# Altium PCB ALU_Ctrl.PcbDoc
Units mil, origin at the board's own origin, x right, y up, seen from the top; angles counter-clockwise.
Board outline 5200 x 2700 mil, 2 copper layers (Top Layer, Bottom Layer), stack 61.756 mil thick; 35 components, 62 nets, 261 pads, 202 vias.
Unrouted connection lines stored in the file: 28.
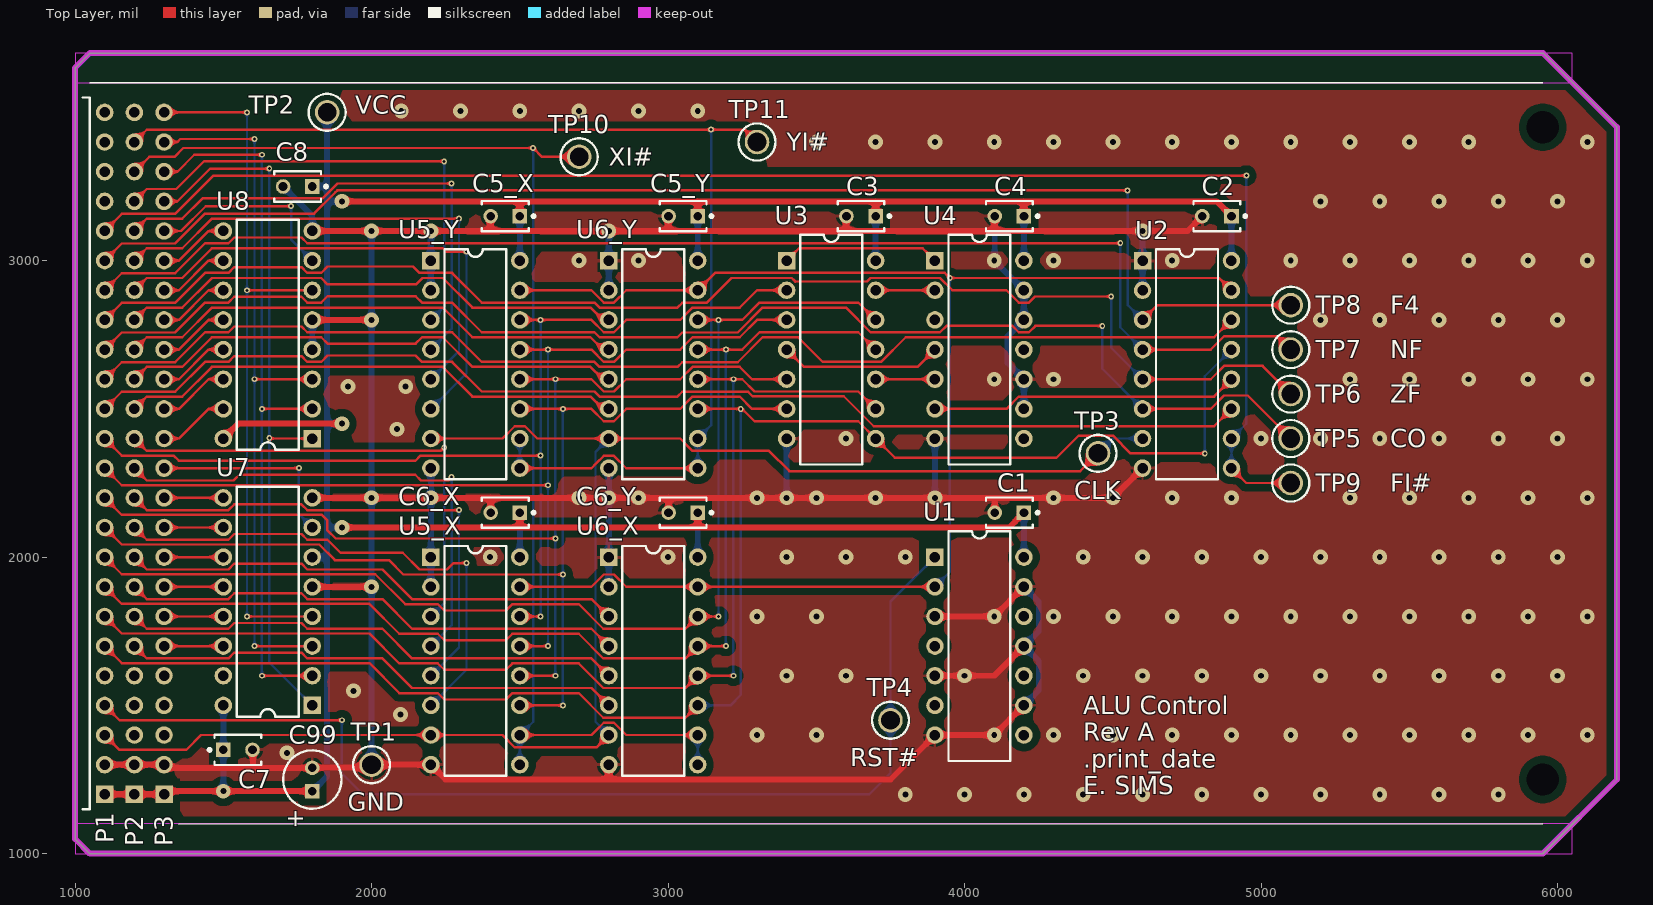
[diagram p0: Top Layer view]
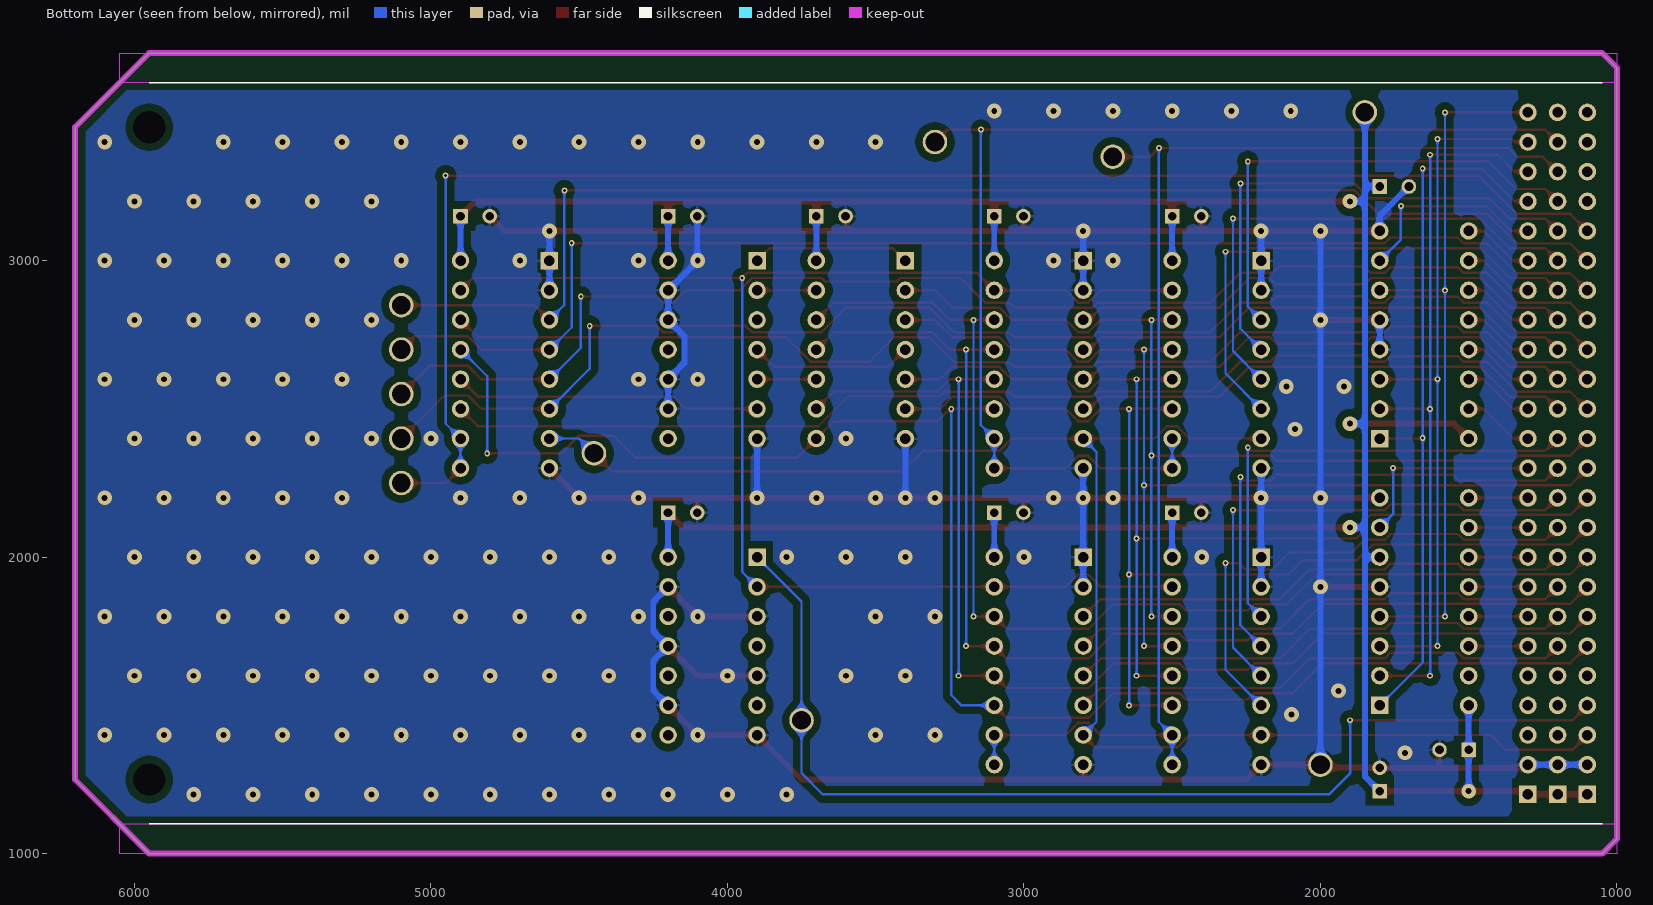
[diagram p1: Bottom Layer view, seen from below]

## Layer stack, top to bottom
Top Solder: solder mask 1, SM-001, Dk 4
Top Layer: signal copper 1.378
Dielectric 1: core 59, Core-043, Dk 4.3
Bottom Layer: signal copper 1.378
Bottom Solder: solder mask 1, SM-001, Dk 4

## Board outline
1000,1050 1050,1000 5950,1000 6200,1250 6200,3450 5950,3700 1050,3700 1000,3650

## Design rules (kind name [scope] priority, off if disabled: settings)
Clearance Clearance_Poly [InPoly] p1: gap=25 ignorepadtopadclearanceinfootprint=FALSE
Clearance [All] p2: gap=8 ignorepadtopadclearanceinfootprint=FALSE
HoleSize [All] p1: absolutevalues=TRUE maxlimit=120 minlimit=10 maxpercent=80.000 minpercent=20.000
PolygonConnect [All] p1: thpad.connectstyle=Relief thpad.reliefconductorwidth=10 thpad.reliefentries=4 thpad.polygonreliefangle="90 Angle" thpad.airgapwidth=10 smdpad.connectstyle=Relief smdpad.reliefconductorwidth=10 smdpad.reliefentries=4 smdpad.polygonreliefangle="90 Angle" smdpad.airgapwidth=10 via.connectstyle=Direct via.reliefconductorwidth=10 via.reliefentries=4 via.polygonreliefangle="90 Angle" via.airgapwidth=10
RoutingVias "Schematic Routing Via Style" [InNetClass('PWR')] p1: holewidth=20 width=35 viastyle="Through Hole" minholewidth=20 minwidth=35 maxholewidth=20 maxwidth=50
RoutingVias [All] p2: holewidth=10 width=20 viastyle="Through Hole" minholewidth=10 minwidth=20 maxholewidth=10 maxwidth=20
SilkToSilkClearance [All] p1: silktosilkclearance=5
SolderMaskExpansion [All] p1: expansion=4 istentingtop=FALSE
Width "Schematic Width Constraint" [InNetClass('PWR')] p1: maxlimit=50 minlimit=20 preferedwidth=20
Width [All] p2: maxlimit=8 minlimit=8 preferedwidth=8
28 further rules are at their usual default settings.

## Classes and differential pairs
net class PWR: GND VCC
net class ALU[0..3]: ALU0 ALU1 ALU2 ALU3
channel class ALU_Reg: X Y
component class Y: C5_Y C6_Y U5_Y U6_Y
component class X: C5_X C6_X U5_X U6_X
component class ZF: C3 C4 U3 U4
component class ALU_Ctrl: C1 C2 C7 C8 C99 P1 P2 P3 TP1 TP2 TP3 TP4 TP5 TP6 TP7 TP8 TP9 TP10 TP11 U1 U2 U7 U8
net class BUS[0..7]: BUS0 BUS1 BUS2 BUS3 BUS4 BUS5 BUS6 BUS7

## Components (designator, comment, footprint, x,y, rotation, side; value= is the part's Value field where it differs from the comment)
C1 "K104K15X7RF5TL2" VISH-K104K15X7RF5TL2 4150.79,2150 r180 top
C2 "K104K15X7RF5TL2" VISH-K104K15X7RF5TL2 4850.79,3150 r180 top
C3 "K104K15X7RF5TL2" VISH-K104K15X7RF5TL2 3650.79,3150 r180 top
C4 "K104K15X7RF5TL2" VISH-K104K15X7RF5TL2 4150.79,3150 r180 top
C5_X "K104K15X7RF5TL2" VISH-K104K15X7RF5TL2 2450.79,3150 r180 top (schematic designator C5)
C5_Y "K104K15X7RF5TL2" VISH-K104K15X7RF5TL2 3050.79,3150 r180 top (schematic designator C5)
C6_X "K104K15X7RF5TL2" VISH-K104K15X7RF5TL2 2450.79,2150 r180 top (schematic designator C6)
C6_Y "K104K15X7RF5TL2" VISH-K104K15X7RF5TL2 3050.79,2150 r180 top (schematic designator C6)
C7 "K104K15X7RF5TL2" VISH-K104K15X7RF5TL2 1549.21,1350 r0 top
C8 "K104K15X7RF5TL2" VISH-K104K15X7RF5TL2 1750.79,3250 r180 top
C99 "Cap Pol5" C5x7 1800,1250 r90 top value=10uF
P1 "Header 24H" HDR1X24H 1100,1200 r90 top locked
P2 "Header 24H" HDR1X24H 1200,1200 r90 top locked
P3 "Header 24H" HDR1X24H 1300,1200 r90 top locked
TP1 "GND" KSTN-5011_V 2000,1300 r0 top
TP2 "VCC" KSTN-5011_V 1850,3500 r0 top
TP3 "CLK" KSTN-5011_V 4450,2350 r0 top
TP4 "RST#" KSTN-5011_V 3750,1450 r0 top
TP5 "CO" KSTN-5011_V 5100,2400 r0 top
TP6 "ZF" KSTN-5011_V 5100,2550 r0 top
TP7 "NF" KSTN-5011_V 5100,2700 r0 top
TP8 "F4" KSTN-5011_V 5100,2850 r0 top
TP9 "FI#" KSTN-5011_V 5100,2250 r0 top
TP10 "XI#" KSTN-5011_V 2700,3350 r0 top
TP11 "YI#" KSTN-5011_V 3300,3400 r0 top
U1 "SN74LS04N" N014 4050,1700 r270 top
U2 "SN74LS173AN" N016D 4750,2650 r270 top
U3 "SN74LS02N" N014 3550,2700 r270 top
U4 "SN74LS21N" N014 4050,2700 r270 top
U5_X "SN74LS173AN" N016D 2350,1650 r270 top (schematic designator U5)
U5_Y "SN74LS173AN" N016D 2350,2650 r270 top (schematic designator U5)
U6_X "SN74LS173AN" N016D 2950,1650 r270 top (schematic designator U6)
U6_Y "SN74LS173AN" N016D 2950,2650 r270 top (schematic designator U6)
U7 "SN74LS138N" N016 1650,1850 r90 top
U8 "SN74LS138N" N016 1650,2750 r90 top

## Footprints (in the part's own frame and the unit in brackets; to place one, negate y for a bottom-side part, rotate by r counter-clockwise, add the part's x,y. Pads: shape width x height; smd on the part's side, far side on the other; paste and mask are expansions set on the pad)
C5x7 [mm] "Capacitor; 2 Leads"
  rect 1.25x1.25 hole 0.75: 1(-1,0)
  round 1.25 hole 0.75: 2(1,0)
  silkscreen extent -2.5,-2.5 2.5,2.5, body extent -2.5,-2.5 2.5,2.5, height 7
HDR1X24H [mm] "Connector; Header; 24 Position; Right Angle"
  rect 1.5x1.5 hole 0.9: 1(0,0)
  round 1.5 hole 0.9: 2(2.54,0) 3(5.08,0) 4(7.62,0) 5(10.16,0) 6(12.7,0) 7(15.24,0) 8(17.78,0) 9(20.32,0) 10(22.86,0) 11(25.4,0) 12(27.94,0) 13(30.48,0) 14(33.02,0) 15(35.56,0) 16(38.1,0) 17(40.64,0) 18(43.18,0) 19(45.72,0) 20(48.26,0) 21(50.8,0) 22(53.34,0) 23(55.88,0) 24(58.42,0)
  silkscreen extent -1.27,1.27 59.69,1.91
KSTN-5011_V [mm] "Test Point, Dia 3.17mm"
  round 2.1 hole 1.6: 1(0,0)
  silkscreen extent -1.59,-1.58 1.59,1.58, body extent -1.59,-1.59 1.59,1.59, height 8.13
N014 [mm] "DIP; 14 Leads; Row Spacing 7.62 mm; Pitch 2.54 mm"
  rect 1.5x1.5 hole 0.9: 1(-7.62,-3.81)
  round 1.5 hole 0.9: 2(-5.08,-3.81) 3(-2.54,-3.81) 4(0,-3.81) 5(2.54,-3.81) 6(5.08,-3.81) 7(7.62,-3.81) 8(7.62,3.81) 9(5.08,3.81) 10(2.54,3.81) 11(0,3.81) 12(-2.54,3.81) 13(-5.08,3.81) 14(-7.62,3.81)
  silkscreen extent -9.85,-2.65 9.85,2.65, body extent -9.15,-5.08 9.15,5.12, height 7.88
N016 [mm] "DIP; 16 Leads; Row Spacing 7.62 mm; Pitch 2.54 mm"
  rect 1.5x1.5 hole 0.9: 1(-8.89,-3.81)
  round 1.5 hole 0.9: 2(-6.35,-3.81) 3(-3.81,-3.81) 4(-1.27,-3.81) 5(1.27,-3.81) 6(3.81,-3.81) 7(6.35,-3.81) 8(8.89,-3.81) 9(8.89,3.81) 10(6.35,3.81) 11(3.81,3.81) 12(1.27,3.81) 13(-1.27,3.81) 14(-3.81,3.81) 15(-6.35,3.81) 16(-8.89,3.81)
  silkscreen extent -9.85,-2.65 9.85,2.65, body extent -10.46,-5.08 10.46,5.12, height 7.88
N016D [mm] "DIP; 16 Leads; Row Spacing 7.62 mm; Pitch 2.54 mm"
  rect 1.5x1.5 hole 0.9: 1(-8.89,-3.81)
  round 1.5 hole 0.9: 2(-6.35,-3.81) 3(-3.81,-3.81) 4(-1.27,-3.81) 5(1.27,-3.81) 6(3.81,-3.81) 7(6.35,-3.81) 8(8.89,-3.81) 9(8.89,3.81) 10(6.35,3.81) 11(3.81,3.81) 12(1.27,3.81) 13(-1.27,3.81) 14(-3.81,3.81) 15(-6.35,3.81) 16(-8.89,3.81)
  silkscreen extent -9.85,-2.65 9.85,2.65, body extent -10.46,-5.08 10.46,5.12, height 7.88
VISH-K104K15X7RF5TL2 [mm] "THD, 2-Leads, Body 4x2.6mm"
  rect 1.25x1.25 hole 0.75: 1(-1.25,0)
  round 1.25 hole 0.75: 2(1.25,0)
  silkscreen extent -2.55,-1.3 2,1.3, body extent -2,-1.3 2,1.3, height 5.6

## Part data
C1 C2 C3 C4 C5_X C5_Y C6_X C6_Y C7 C8: library part CMP-2000-06508-1, "Ceramic Capacitor, 100 nF, +/- 10%, 50 V, -55 to 125 degC, 2-Pin THD, RoHS, Tape and Reel", Capacitance=0.1µF, Manufacturer=Vishay, Operating Temperature=-55°C~125°C, Package / Case=Radial, Package Description="2-Pin Through Hole Device, Body 4 x 2.6 mm", Ratings=-, Standard Package=1, Temperature Coefficient=X7R, Tolerance=±10%, Voltage - Rated=50V, Applications=GeneralPurpose, Catalog Drawings=Mono-KapSide2-15_5.58Mono-KapSide1_15, Category=Capacitors, Datasheet URL=http://www.vishay.com/docs/45171/kseries.pdf, Datasheet Version=08/2013, Family=CeramicCapacitors, Features=-, Height - Seated (Max)="0.220\"(5.58mm)", Lead Spacing="0.098\"(2.50mm)", Lead Style=Straight, Manufacturer URL=http://www.vishay.com/, Mounting Technology=ThroughHole, Mounting Type=ThroughHole, Online Catalog=Mono-Kap™Series, Other Names=BC1084CT, Package Reference=K104K15X7RF5TL2, Packaging=CutTape(CT), Series=Mono-Kap™K, Size / Dimension="0.157\"Lx0.098\"W(4.00mmx2.50mm)", Thickness (Max)=-
C99: "Polarized Capacitor", LatestRevisionDate=17-Jul-2002, LatestRevisionNote="Re-released for DXP Platform.", PackageDescription="Polarized Capacitor; 2 Leads", PackageReference=POLAR0.8, Published=8-Jun-2000, Publisher="Altium Limited"
P1 P2 P3: "Header, 24-Pin, Right Angle", LatestRevisionDate=17-Jul-2002, LatestRevisionNote="Re-released for DXP Platform.", Publisher="Altium Limited", System=Connector
TP1 TP2 TP3 TP4 TP5 TP6 TP7 TP8 TP9 TP10 TP11: library part TP
U1: "Hex Inverter", ComponentLink1Description="Manufacturer Link", ComponentLink1URL=http://www.ti.com/, ComponentLink2Description=Datasheet, ComponentLink2URL=http://www-s.ti.com/sc/ds/sn74ls04.pdf, DatasheetVersion=Mar-1988, LatestRevisionDate=04-Mar-2005, LatestRevisionNote="Stylized 3D Model Added.", PackageDescription="DIP; 14 Leads; Row Spacing 7.62 mm; Pitch 2.54 mm", PackageReference=N014, PackageVersion=Oct-1995, Published=8-Jun-2000, Publisher="Altium Limited"
U2 U5_X U5_Y U6_X U6_Y: "4-Bit D-Type Register with 3-State Outputs", Code_JEDEC=MS-001-BB, ComponentLink1Description="Manufacturer Link", ComponentLink1URL=http://www.ti.com/, ComponentLink2Description=Datasheet, ComponentLink2URL=http://www-s.ti.com/sc/ds/sn74ls173a.pdf, DatasheetVersion=Mar-1988, LatestRevisionDate=04-Mar-2005, LatestRevisionNote="Stylized 3D Model Added.", PackageDescription="DIP; 16 Leads; Row Spacing 7.62 mm; Pitch 2.54 mm", PackageReference=N016D, PackageVersion=Oct-1995, Published=8-Jun-2000, Publisher="Altium Limited"
U3: "Quadruple 2-Input Positive-NOR Gate", ComponentLink1Description="Manufacturer Link", ComponentLink1URL=http://www.ti.com/, ComponentLink2Description=Datasheet, ComponentLink2URL=http://www-s.ti.com/sc/ds/sn54s02.pdf, DatasheetVersion=Mar-1988, LatestRevisionDate=04-Mar-2005, LatestRevisionNote="Stylized 3D Model Added.", PackageDescription="DIP; 14 Leads; Row Spacing 7.62 mm; Pitch 2.54 mm", PackageReference=N014, PackageVersion=Oct-1995, Published=8-Jun-2000, Publisher="Altium Limited"
U4: "Dual 4-Input Positive-AND Gate", ComponentLink1Description="Manufacturer Link", ComponentLink1URL=http://www.ti.com/, ComponentLink2Description=Datasheet, ComponentLink2URL=http://www-s.ti.com/sc/ds/SN74LS21.pdf, DatasheetVersion=Mar-1988, LatestRevisionDate=04-Mar-2005, LatestRevisionNote="Stylized 3D Model Added.", Note="Pins 3 and 11 are NC & not drawn.", PackageDescription="DIP; 14 Leads; Row Spacing 7.62 mm; Pitch 2.54 mm", PackageReference=N014, PackageVersion=Oct-1995, Published=8-Jun-2000, Publisher="Altium Limited"
U7 U8: "3-Line to 8-Line Decoder / Demultiplexer", Code_JEDEC=MS-001-BB, ComponentLink1Description="Manufacturer Link", ComponentLink1URL=http://www.ti.com/, ComponentLink2Description=Datasheet, ComponentLink2URL=http://www-s.ti.com/sc/ds/sn74ls138.pdf, DatasheetVersion=Mar-1988, LatestRevisionDate=04-Mar-2005, LatestRevisionNote="Stylized 3D Model Added.", PackageDescription="DIP; 16 Leads; Row Spacing 7.62 mm; Pitch 2.54 mm", PackageReference=N016, PackageVersion=Oct-1995, Published=8-Jun-2000, Publisher="Altium Limited"

## Free pads (board coordinates)
  round 0 hole 109: ""(5950,1250) ""(5950,3450)

## Via types
v1: diameter 50, hole 20, Top Layer to Bottom Layer, tented both sides, 152 vias
v2: diameter 20, hole 10, Top Layer to Bottom Layer, tented both sides, 50 vias

## Nets (pads, with @x,y where several pads share a name; then routed paths per layer and width w, separated by ;. In a path a pad name is that pad's centre, name@x,y a point inside that pad or via, vN(x,y) a via of type N, cw(c..) or ccw(c..) an arc to the next point about the centre after c; other vN are vias at no path point)
ALU0: P3.21 U7.1 U8.1 | length 2416.1
  Top Layer w8: P3.21 1345,3200 1455,3310 v2(1655,3310) ; v2(1655,2401.07) 1656.07,2400 U8.1
  Bottom Layer w8: v2(1655,3310) v2(1655,2401.07) 1655,1645 U7.1
ALU1: P3.22 U7.2 U8.2 | length 2450.6
  Top Layer w8: P3.22 1345,3300 1402,3357 v2(1630,3357) ; v2(1630,1600) U7.2 ; v2(1630,2500) U8.2
  Bottom Layer w8: v2(1630,1600) v2(1630,3357)
ALU2: P3.23 U7.3 U8.3 | length 2409.1
  Top Layer w8: P3.23 1345,3400 1355,3410 v2(1605,3410) ; v2(1605,1700) U7.3 ; v2(1605,2600) U8.3
  Bottom Layer w8: v2(1605,1700) v2(1605,3410)
ALU3: P3.24 U7.4 U8.6 | length 2420
  Top Layer w8: P3.24 v2(1580,3500) ; v2(1580,1800) U7.4 ; v2(1580,2900) U8.6
  Bottom Layer w8: v2(1580,1800) v2(1580,3500)
BUS0: P1.13 U3.2 U5_X.14 U5_Y.14 | length 3554.1
  Top Layer w8: P1.13 1157.53,2342.47 1332.53,2342.47 1350,2325 2147.78,2325 2165.26,2342.47 v2(2570,2342.47) ; U5_X.14 v2(2570,1800) ; U5_Y.14 2741.27,2800 2782.8,2758.47 2817.2,2758.47 2858.73,2800 3041.27,2800 3082.8,2841.53 3241.53,2841.53 3300,2900 U3.2
  Bottom Layer w8: v2(2570,1800) v2(2570,2800)
BUS1: P1.12 U3.3 U5_X.13 U5_Y.13 | length 3589.7
  Top Layer w8: P1.12 1157.53,2242.47 v2(2595,2242.47) ; U5_X.13 v2(2595,1700) ; U5_Y.13 2741.27,2700 2782.8,2658.47 2817.2,2658.47 2858.73,2700 3041.27,2700 3082.8,2741.53 3241.53,2741.53 3300,2800 U3.3
  Bottom Layer w8: v2(2595,1700) v2(2595,2700)
BUS2: P1.11 U3.5 U5_X.12 U5_Y.12 | length 3685.6
  Top Layer w8: P1.11 1157.53,2142.47 1832.53,2142.47 1850,2125 1850,2091.94 1878.94,2063 v2(2620,2063) ; U5_X.12 v2(2620,1600) ; U5_Y.12 2741.27,2600 2782.8,2558.47 2817.2,2558.47 2858.73,2600 3041.27,2600 3082.8,2641.53 3241.53,2641.53 3283.05,2600 U3.5
  Bottom Layer w8: v2(2620,1600) v2(2620,2063) v2(2620,2600) v2@2620,2600.63
BUS3: P1.10 U3.6 U5_X.11 U5_Y.11 | length 3722.9
  Top Layer w8: P1.10 1157.53,2042.47 1823.66,2042.47 1876.13,1990 2058.35,1990 2106.82,1941.53 v2(2645,1941.53) ; U5_X.11 v2(2645,1500) ; U5_Y.11 2741.27,2500 2782.8,2458.47 2817.2,2458.47 2858.73,2500 3041.27,2500 3082.8,2541.53 3241.53,2541.53 3283.05,2500 U3.6
  Bottom Layer w8: v2(2645,1500) v2@2645,1940 ; v2(2645,1941.53) v2(2645,2500)
BUS4: P1.9 U3.12 U6_X.14 U6_Y.14 | length 3853.5
  Top Layer w8: P1.9 1157.53,1942.47 2012.53,1942.47 2113.47,1841.53 2223.47,1841.53 2245,1820 2453.47,1820 2475,1841.53 2698.47,1841.53 2781.53,1758.47 3058.47,1758.47 U6_X.14 v2(3170,1800) ; U6_Y.14 3250,2800 3308.47,2858.47 3641.53,2858.47 U3.12
  Bottom Layer w8: v2(3170,1800) v2(3170,2800)
BUS5: P1.8 U3.11 U6_X.13 U6_Y.13 | length 3878.5
  Top Layer w8: P1.8 1157.53,1842.47 1992.53,1842.47 2093.47,1741.53 2223.47,1741.53 2245,1720 2453.47,1720 2475,1741.53 2698.47,1741.53 2781.53,1658.47 3058.47,1658.47 U6_X.13 v2(3195,1700) ; U6_Y.13 3250,2700 3308.47,2758.47 3641.53,2758.47 U3.11
  Bottom Layer w8: v2(3195,1700) v2(3195,2700)
BUS6: P1.7 U3.9 U6_X.12 U6_Y.12 | length 3897.1
  Top Layer w8: P1.7 1157.53,1742.47 1992.53,1742.47 2093.47,1641.53 2223.47,1641.53 2245,1620 2453.47,1620 2475,1641.53 2698.47,1641.53 2781.53,1558.47 3058.47,1558.47 U6_X.12 v2(3220,1600) ; U6_Y.12 3250,2600 3291.53,2558.47 3641.53,2558.47 U3.9
  Bottom Layer w8: v2(3220,1600) v2@3220,2600.63
  other v2: 3220,2600
BUS7: P1.6 U2.13 U3.8 U6_X.11 U6_Y.11 | length 5481.1
  Top Layer w8: P1.6 1157.53,1642.47 1992.53,1642.47 2093.47,1541.53 2223.47,1541.53 2245,1520 2453.47,1520 2475,1541.53 2698.47,1541.53 2781.53,1458.47 3058.47,1458.47 U6_X.11 ; U6_Y.11 3250,2500 3291.53,2458.47 3641.53,2458.47 U3.8 3765,2335 4310,2335 4385,2410 4500,2410 4560,2350 v2(4810,2350)
  Bottom Layer w8: U6_X.11 3210,1500 3245,1535 v2(3245,2500) ; v2(4810,2350) 4810,2610 U2.13
CLK: P1.3 TP3.1 U2.7 U5_X.7 U5_Y.7 U6_X.7 U6_Y.7 | length 5338.6
  Top Layer w8: P1.3 1150,1350 1375,1350 1425,1400 U5_X.7 2441.27,1400 2482.8,1358.47 2758.47,1358.47 U6_X.7 ; U5_Y.7 2441.27,2400 2482.8,2441.53 2517.2,2441.53 2558.73,2400 U6_Y.7 3041.27,2400 3082.8,2358.47 3340.47,2358.47 3408.94,2290 4390,2290 TP3.1
  Bottom Layer w8: U6_X.7 2755,1445 2755,2355 U6_Y.7 ; TP3.1 4500,2400 U2.7
CO: P1.16 TP5.1 U2.6 | length 4529.9
  Top Layer w8: P1.16 1157.53,2757.53 1337.53,2757.53 1438.47,2858.47 1517.2,2858.47 1536.73,2878 1763.27,2878 1782.8,2858.47 1830,2858.47 1851.53,2880 2148.47,2880 2170,2858.47 2271.53,2858.47 2371.53,2758.47 2751.53,2758.47 2768.47,2741.53 3031.53,2741.53 3047.53,2757.53 3234.9,2757.53 3318.9,2841.53 3599.74,2841.53 3682.8,2758.47 3917.2,2758.47 3938.73,2780 4161.27,2780 4182.8,2758.47 4217.2,2758.47 4238.73,2780 v2(4464.28,2780) ; U2.6 4830,2500 4875,2545 4955,2545 TP5.1
  Bottom Layer w8: v2(4464.28,2780) 4464.28,2635.72 U2.6
CO_IMM: P1.14 U2.11 | length 4027
  Top Layer w8: P1.14 1157.53,2557.53 1337.53,2557.53 1438.47,2658.47 1517.2,2658.47 1536.73,2678 1763.27,2678 1782.8,2658.47 1830,2658.47 1851.53,2680 2148.47,2680 2170,2658.47 2271.53,2658.47 2371.53,2558.47 2751.53,2558.47 2768.47,2541.53 3031.53,2541.53 3047.53,2557.53 3269.85,2557.53 3284.9,2542.47 3592.53,2542.47 3693.47,2441.53 4841.53,2441.53 U2.11
F4: P1.19 TP8.1 U2.3 | length 4526.2
  Top Layer w8: P1.19 1157.53,3057.53 1337.53,3057.53 1438.47,3158.47 1517.2,3158.47 1806.15,3158.47 1873.84,3226.16 ; 1873.84,3226.21 1877.63,3230 1884.67,3237 4549.25,3237 v2(4550,3236.25) ; U2.3 4650,2850 TP8.1
  Bottom Layer w8: v2(4550,3236.25) 4550,2850 U2.3
F4_IMM: P1.15 U2.14 | length 4064.7
  Top Layer w8: P1.15 1157.53,2657.53 1337.53,2657.53 1438.47,2758.47 1517.2,2758.47 1536.73,2778 1763.27,2778 1782.8,2758.47 2271.53,2758.47 2371.53,2658.47 2751.53,2658.47 2768.47,2641.53 3031.53,2641.53 3047.53,2657.53 3234.9,2657.53 3318.9,2741.53 3438.47,2741.53 3521.53,2658.47 3718.47,2658.47 3801.53,2741.53 4841.53,2741.53 U2.14
FI#: P1.20 TP9.1 U2.9 U2.10 | length 5155.3
  Top Layer w8: P1.20 1157.53,3157.53 1337.53,3157.53 1466.61,3286.61 v2(4950,3286.61) ; U2.9 4950,2250 TP9.1
  Bottom Layer w8: U2.9 U2.10 4950,2450 v2(4950,3286.61)
GND: C1.2 C2.2 C3.2 C4.2 C5_X.2 C5_Y.2 C6_X.2 C6_Y.2 C7.2 C8.2 C99.2 P1.2 P2.2 P3.2 TP1.1 U1.3 U1.5 U1.7 U1.9 U1.11 U1.13 U2.1 U2.2 U2.8 U3.7 U4.7 U4.9 U4.10 U4.12 U4.13 U5_X.1 U5_X.2 U5_X.8 U5_Y.1 U5_Y.2 U5_Y.8 U6_X.1 U6_X.2 U6_X.8 U6_Y.1 U6_Y.2 U6_Y.8 U7.5 U7.8 U8.4 U8.5 U8.8 | length 15941.6
  Top Layer w20: P1.2 P2.2 P3.2 1310.63,1289.37 C99.2 ; C7.2 1600,1348.43 1600,1300 ; C99.2@1800,1290 1990,1290 TP1.1 U5_X.8 2250,1250 2800,1250 ; U7.5 v1(2000,1900) ; U8.5 v1(2000,2800) ; U8.8 v1(2000,3100) v1(2200,3100) 2400,3100 ; U7.8@1801.57,2200 2401.57,2200 ; C6_X.2 2401.57,2200 ; C5_X.2 2400,3148.43 2400,3100 ; U6_X.8 2800,1250 ; C6_Y.2 3001.57,2200 ; C5_Y.2 3000,3148.43 3000,3100 ; C3.2 3600,3148.43 3600,3100 ; U1.5 4100,1600 U1.11 ; U1.3 v1(4100,1800) U1.13 ; C1.2 4101.57,2198.43 4100,2200 ; C4.2 4100,3148.43 4100,3100 ; U1.9 v1(4100,1400) U1.7 3750,1250 2800,1250 ; U2.8 v1(4500,2200) 4100,2200 ; C2.2 4751.57,3100 v1(4600,3100) 4100,3100 ; 2400,3100 v1(2800,3100) 3000,3100 ; 2401.57,2200 3001.57,2200 ; 3000,3100 3600,3100 ; 3001.57,2200 v1(3400,2200) v1(3900,2200) 4100,2200 ; 3600,3100 4100,3100
  Bottom Layer w20: P1.2 P2.2 P3.2 ; C8.2 1800,3151.57 U8.8 ; U8.4 U8.5 ; TP1.1 v1(2000,1900) v1(2000,2200) v1(2000,2800) v1(2000,3100) ; U5_X.2 U5_X.1 v1(2200,2200) U5_Y.8 ; U5_Y.2 U5_Y.1 v1(2200,3100) ; U6_X.2 U6_X.1 v1(2800,2200) U6_Y.8 ; U6_Y.2 U6_Y.1 v1(2800,3100) ; v1(3400,2200) U3.7 ; v1(3900,2200) U4.7 ; C4.2 4101.57,2998.43 U4.13 U4.12 4145,2745 4145,2655 U4.10 U4.9 ; U1.9 4250,1550 4250,1650 U1.11 4250,1750 4250,1850 U1.13 ; U2.2 U2.1 v1(4600,3100)
  other v1: 3800,1200 4000,1200 4200,1200 4400,1200 4600,1200 4800,1200 5000,1200 5200,1200 5400,1200 5600,1200 5800,1200 1715,1340 3300,1400 3500,1400 4300,1400 4500,1400 4700,1400 4900,1400 5100,1400 5300,1400 5500,1400 5700,1400 5900,1400 6100,1400 2097.26,1468.74 1939.57,1549.2 3400,1600 3600,1600 4000,1600 4400,1600 4600,1600 4800,1600 5000,1600 5200,1600 5400,1600 5600,1600 5800,1600 6000,1600 3300,1800 3500,1800 4300,1800 4500,1800 4700,1800 4900,1800 5100,1800 5300,1800 5500,1800 5700,1800 5900,1800 6100,1800 2400,2000 3000,2000 3400,2000 3600,2000 3800,2000 4400,2000 4600,2000 4800,2000 5000,2000 5200,2000 5400,2000 5600,2000 5800,2000 6000,2000 2700,2200 2900,2200 3300,2200 3500,2200 3700,2200 4300,2200 4700,2200 4900,2200 5300,2200 5500,2200 5700,2200 5900,2200 6100,2200 3600,2400 5000,2400 5200,2400 5400,2400 5600,2400 5800,2400 6000,2400 2085.72,2431.54 1920,2575 2115,2575 4100,2600 4300,2600 5300,2600 5500,2600 5700,2600 5900,2600 6100,2600 5200,2800 5400,2800 5600,2800 5800,2800 6000,2800 2700,3000 2900,3000 4100,3000 4300,3000 4700,3000 5100,3000 5300,3000 5500,3000 5700,3000 5900,3000 6100,3000 5200,3200 5400,3200 5600,3200 5800,3200 6000,3200 3500,3400 3700,3400 3900,3400 4100,3400 4300,3400 4500,3400 4700,3400 4900,3400 5100,3400 5300,3400 5500,3400 5700,3400 6100,3400 2100,3505 2300,3505 2500,3505 2700,3505 2900,3505 3100,3505
LOAD#_X: P2.22 TP10.1 U5_X.9 U5_X.10 U6_X.9 U6_X.10 | length 4378.6
  Top Layer w8: P2.22 1250,3350 1335,3350 1365,3380 v2(2545,3380) 2575,3350 TP10.1 ; U5_X.10 2741.27,1400 2758.47,1417.2 2782.8,1441.53 2817.2,1441.53 2858.73,1400 U6_X.10
  Bottom Layer w8: U5_X.9 U5_X.10 2545,1445 v2(2545,3380) ; U6_X.9 U6_X.10
LOAD#_Y: P2.23 TP11.1 U5_Y.9 U5_Y.10 U6_Y.9 U6_Y.10 | length 4029
  Top Layer w8: P2.23 1241.53,3441.53 v2(3145,3441.53) 3258.47,3441.53 TP11.1 ; U5_Y.9 2741.27,2300 2758.47,2317.2 2782.8,2341.53 2817.2,2341.53 2858.73,2300 U6_Y.9
  Bottom Layer w8: U5_Y.9 U5_Y.10 ; U6_Y.9 U6_Y.10 3145,2445 v2(3145,3441.53)
M\1: P3.6 U7.14 | length 200
  Top Layer w8: P3.6 U7.14
M\2: P3.7 U7.13 | length 200
  Top Layer w8: P3.7 U7.13
M\3: P3.8 U7.12 | length 200
  Top Layer w8: P3.8 U7.12
M\4: P3.9 U7.11 | length 200
  Top Layer w8: P3.9 U7.11
M\5: P3.10 U7.10 | length 200
  Top Layer w8: P3.10 U7.10
M\6: P3.11 U7.9 | length 200
  Top Layer w8: P3.11 U7.9
M\7: P3.12 U7.7 | length 673.6
  Top Layer w8: P3.12 v2(1755,2300)
  Bottom Layer w8: v2(1755,2300) 1755,2145 U7.7
M\8: P3.13 U8.15 | length 241.4
  Top Layer w8: P3.13 1350,2400 1450,2500 U8.15
M\9: P3.14 U8.14 | length 241.4
  Top Layer w8: P3.14 1350,2500 1450,2600 U8.14
M\10: P3.15 U8.13 | length 241.4
  Top Layer w8: P3.15 1350,2600 1450,2700 U8.13
M\11: P3.16 U8.12 | length 241.4
  Top Layer w8: P3.16 1350,2700 1450,2800 U8.12
M\12: P3.17 U8.11 | length 241.4
  Top Layer w8: P3.17 1350,2800 1450,2900 U8.11
M\13: P3.18 U8.10 | length 241.4
  Top Layer w8: P3.18 1350,2900 1450,3000 U8.10
M\14: P3.19 U8.9 | length 241.4
  Top Layer w8: P3.19 1350,3000 1450,3100 U8.9
M\15: P3.20 U8.7 | length 676.2
  Top Layer w8: P3.20 1357.37,3100 1440.86,3183.49 v2(1728.49,3183.49)
  Bottom Layer w8: v2(1728.49,3183.49) 1728.49,3071.51 U8.7
NetU3_1: U3.1 U4.1 | length 534.4
  Top Layer w8: U3.1 3441.53,3041.53 3858.47,3041.53 U4.1
NetU3_4: U3.4 U4.4 | length 548.4
  Top Layer w8: U3.4 3458.47,2641.53 3841.53,2641.53 U4.4
NetU3_10: U3.10 U4.5 | length 200
  Top Layer w8: U3.10 U4.5
NetU3_13: U3.13 U4.2 | length 200
  Top Layer w8: U3.13 U4.2
NF: P1.18 TP7.1 U2.4 | length 4435.8
  Top Layer w8: P1.18 1157.53,2957.53 1337.53,2957.53 1438.47,3058.47 1517.2,3058.47 1536.73,3078 1763.27,3078 1782.8,3058.47 4523.47,3058.47 v2(4525,3060) ; U2.4 4830,2700 4875,2745 5055,2745 TP7.1
  Bottom Layer w8: v2(4525,3060) 4525,2775 U2.4
REG0_X: P2.13 U5_X.3 | length 1655.6
  Top Layer w8: P2.13 1241.53,2358.47 2233.47,2358.47 v2(2245,2370)
  Bottom Layer w8: U5_X.3 2245,1845 v2(2245,2370)
REG0_Y: P2.21 U5_Y.3 | length 1654.6
  Top Layer w8: P2.21 1241.53,3241.53 1341.53,3241.53 1435,3335 v2(2245,3335)
  Bottom Layer w8: U5_Y.3 2245,2845 v2(2245,3335)
REG1_X: P2.12 U5_X.4 | length 1707.1
  Top Layer w8: P2.12 1241.53,2258.47 1519.14,2258.47 1534.5,2258.47 1541.53,2265.5 1554.03,2278 2147.5,2278 2167.03,2258.47 2258.47,2258.47 v2(2270,2270)
  Bottom Layer w8: U5_X.4 2270,1770 v2(2270,2270)
REG1_Y: P2.20 U5_Y.4 | length 1725.3
  Top Layer w8: P2.20 1241.53,3141.53 1361.53,3141.53 1430,3210 1835,3210 1885,3260 v2(2270,3260)
  Bottom Layer w8: U5_Y.4 2270,2770 v2(2270,3260)
REG2_X: P2.11 U5_X.5 | length 1726.2
  Top Layer w8: P2.11 1241.53,2158.47 1517.2,2158.47 1536.73,2178 1763.27,2178 1782.8,2158.47 v2(2295,2158.47)
  Bottom Layer w8: U5_X.5 2295,1695 v2(2295,2158.47)
REG2_Y: P2.19 U5_Y.5 | length 1734.5
  Top Layer w8: P2.19 1241.53,3041.53 1361.53,3041.53 1461.53,3141.53 v2(2295,3141.53)
  Bottom Layer w8: U5_Y.5 2295,2695 v2(2295,3141.53)
REG3_X: P2.10 U5_X.6 | length 1733.4
  Top Layer w8: P2.10 1241.53,2058.47 1485,2058.47 1517.2,2058.47 1536.73,2078 1763.27,2078 1782.8,2058.47 1851.53,2058.47 1895,2015 2105,2015 2161.53,1958.47 2254.59,1958.47 2276.11,1979.99 v2(2320,1979.99)
  Bottom Layer w8: U5_X.6 2320,1620 v2(2320,1979.99)
REG3_Y: P2.18 U5_Y.6 | length 1763.1
  Top Layer w8: P2.18 1241.53,2941.53 1361.53,2941.53 1461.53,3041.53 2240,3041.53 2251.53,3030 v2(2320,3030)
  Bottom Layer w8: U5_Y.6 2320,2620 v2(2320,3030)
REG4_X: P2.9 U6_X.3 | length 1699
  Top Layer w8: P2.9 1241.53,1958.47 1517.2,1958.47 1536.73,1978 1763.27,1978 1782.8,1958.47 2036.53,1958.47 2136.53,1858.47 2741.53,1858.47 U6_X.3
REG4_Y: P2.17 U6_Y.3 | length 1735.1
  Top Layer w8: P2.17 1241.53,2841.53 1361.53,2841.53 1461.53,2941.53 1830,2941.53 1851.53,2920 2150,2920 2171.53,2941.53 2240,2941.53 2340,2841.53 2738.47,2841.53 2780,2800 U6_Y.3
REG5_X: P2.8 U6_X.4 | length 1699
  Top Layer w8: P2.8 1241.53,1858.47 1517.2,1858.47 1536.73,1878 1763.27,1878 1782.8,1858.47 2036.53,1858.47 2136.53,1758.47 2741.53,1758.47 U6_X.4
REG5_Y: P2.16 U6_Y.4 | length 1717.2
  Top Layer w8: P2.16 1241.53,2741.53 1361.53,2741.53 1461.53,2841.53 2240,2841.53 2340,2741.53 2738.47,2741.53 2780,2700 U6_Y.4
REG6_X: P2.7 U6_X.5 | length 1699
  Top Layer w8: P2.7 1241.53,1758.47 1517.2,1758.47 1536.73,1778 1763.27,1778 1782.8,1758.47 2036.53,1758.47 2136.53,1658.47 2741.53,1658.47 U6_X.5
REG6_Y: P2.15 U6_Y.5 | length 1735.1
  Top Layer w8: P2.15 1241.53,2641.53 1361.53,2641.53 1461.53,2741.53 1830,2741.53 1851.53,2720 2148.47,2720 2170,2741.53 2240,2741.53 2340,2641.53 2738.47,2641.53 2780,2600 U6_Y.5
REG7_X: P2.6 U6_X.6 | length 1699
  Top Layer w8: P2.6 1241.53,1658.47 1517.2,1658.47 1536.73,1678 1763.27,1678 1782.8,1658.47 2036.53,1658.47 2136.53,1558.47 2741.53,1558.47 U6_X.6
REG7_Y: P2.14 U6_Y.6 | length 1717.2
  Top Layer w8: P2.14 1241.53,2541.53 1361.53,2541.53 1461.53,2641.53 2240,2641.53 2340,2541.53 2738.47,2541.53 2780,2500 U6_Y.6
RST: U1.2 U2.15 U5_X.15 U5_Y.15 U6_X.15 U6_Y.15 | length 4979.5
  Top Layer w8: U5_X.15 2741.27,1900 2782.8,1941.53 2817.2,1941.53 2858.73,1900 U6_X.15 U1.2 ; U5_Y.15 2741.27,2900 2782.8,2858.47 2817.2,2858.47 2858.73,2900 U6_Y.15 3158.47,2958.47 3933.06,2958.47 v2(3950,2941.53) 4858.47,2941.53 U2.15
  Bottom Layer w8: U1.2 3950,1950 v2(3950,2941.53)
RST#: P1.4 TP4.1 U1.1 | length 3699.6
  Top Layer w8: P1.4 1150,1450 v2(1900,1450)
  Bottom Layer w8: v2(1900,1450) 1900,1270.64 1970.64,1200 3678.48,1200 3750,1271.52 TP4.1 3750,1850 U1.1
VCC: C1.1 C2.1 C3.1 C4.1 C5_X.1 C5_Y.1 C6_X.1 C6_Y.1 C7.1 C8.1 C99.1 P1.1 P2.1 P3.1 TP2.1 U1.14 U2.16 U3.14 U4.14 U5_X.16 U5_Y.16 U6_X.16 U6_Y.16 U7.6 U7.16 U8.16 | length 10866
  Top Layer w20: P1.1 P2.1 P3.1 1310.63,1210.63 C99.1 ; U8.16 1550,2450 v1(1900,2450) ; v1(1900,2100) 2500,2100 ; v1(1900,3200) 2500,3200 ; C6_X.1 2500,2100 ; C5_X.1 2500,3200 ; C6_Y.1 3100,2100 ; C5_Y.1 3100,3200 ; C3.1 3700,3200 ; C1.1 4150,2100 3100,2100 ; C4.1 4200,3200 ; C2.1 4850,3200 4200,3200 ; 2500,2100 3100,2100 ; 2500,3200 3100,3200 ; 3100,3200 3700,3200 ; 3700,3200 4200,3200
  Bottom Layer w20: v1(1500,1210.63) C7.1 U7.16 ; C99.1 1850,1260.63 1850,1391.47 1850,2000 ; U7.6 1850,2000 ; C8.1 1850,3250 1850,3200 ; 1850,2100 v1(1900,2100) ; TP2.1 1850,3200 ; v1(1900,2450) 1850,2450 ; v1(1900,3200) 1850,3200 ; U5_X.16 C6_X.1 ; U5_Y.16 C5_X.1 ; U6_X.16 C6_Y.1 ; U6_Y.16 C5_Y.1 ; U3.14 C3.1 ; U1.14 C1.1 ; U4.14 C4.1 ; U2.16 C2.1 ; 1850,2000 1850,2200 1850,2450 ; 1850,2450 1850,3200
ZF: P1.17 TP6.1 U2.5 | length 4517.8
  Top Layer w8: P1.17 1157.53,2857.53 1337.53,2857.53 1438.47,2958.47 1517.2,2958.47 1536.73,2978 1763.27,2978 1782.8,2958.47 1830,2958.47 1851.53,2980 2140,2980 2161.53,2958.47 2271.53,2958.47 2371.53,2858.47 2751.53,2858.47 2768.47,2841.53 3031.53,2841.53 3047.53,2857.53 3130,2857.53 3214,2941.53 3417.2,2941.53 3424.36,2934.36 3429.36,2929.36 3429.47,2929.47 3670.75,2929.47 3682.8,2941.53 3917.2,2941.53 3958.73,2900 4141.27,2900 4182.8,2858.47 4217.2,2858.47 4237.85,2879.12 v2(4494.46,2879.12) ; U2.5 4830,2600 4875,2645 5005,2645 TP6.1
  Bottom Layer w8: v2(4494.46,2879.12) 4494.46,2705.54 U2.5
ZF_IMM: U2.12 U4.6 | length 1041.4
  Top Layer w8: U4.6 4141.27,2500 4182.8,2541.53 4841.53,2541.53 U2.12
pads on no net: P1.5 P1.21 P1.22 P1.23 P1.24 P2.3 P2.4 P2.5 P2.24 P3.3 P3.4 P3.5 U1.4 U1.6 U1.8 U1.10 U1.12 U4.3 U4.8 U4.11 U7.15

## Polygon pours and split planes (outlines as drawn)
GND on Top Layer "GND_L01_P000" (solid, remove dead copper, pour order 0): 1000,1000 1000,3700 6200,3700 6200,1000
GND on Bottom Layer "GND_L02_P001" (solid, remove dead copper, pour order 1): 1000,1000 1000,3700 6200,3700 6200,1000

## Keep-outs
Top Layer:
  rectangle: 1000,1000 6050,1100
  rectangle: 1000,3600 6050,3700
Bottom Layer:
  rectangle: 1000,1000 6050,1100
  rectangle: 1000,3600 6050,3700
Keep-Out Layer:
  lines w20: 1000,1050 1000,3650 ; 1000,1050 1050,1000 ; 1000,1050 1000,3650 ; 1000,1050 1050,1000 ; 1000,3650 1050,3700 ; 1000,3650 1050,3700 ; 1050,1000 5950,1000 ; 1050,1000 5950,1000 ; 1050,3700 5950,3700 ; 1050,3700 5950,3700 ; 5950,1000 6200,1250 ; 5950,1000 6200,1250 ; 5950,3700 6200,3450 ; 5950,3700 6200,3450 ; 6200,1250 6200,3450 ; 6200,1250 6200,3450

## Silkscreen, mask and mechanical layers (free items; w line width, h text height)
Top Overlay:
  lines w5: 1050,3600 5950,3600 ; 1350,1100 5950,1100
  text "ALU Control / Rev A / .print_date / E. SIMS" at 4400,1200 h60
Bottom Overlay:
  lines w5: 1050,1100 5950,1100 ; 1050,3600 5950,3600

## Text inside footprints (layer, text, board x,y; h text height)
C99: Top Overlay "+" at 1719.03,1150.84 h59.06 r270